# Altium PCB JLINK_OB_072.PcbDoc
Units mm, origin at the board's own origin, x right, y up, seen from the top; angles counter-clockwise.
Board outline 35 x 18 mm, 2 copper layers (Top Layer, Bottom Layer), stack 1.671 mm thick; 27 components, 25 nets, 147 pads, 33 vias.
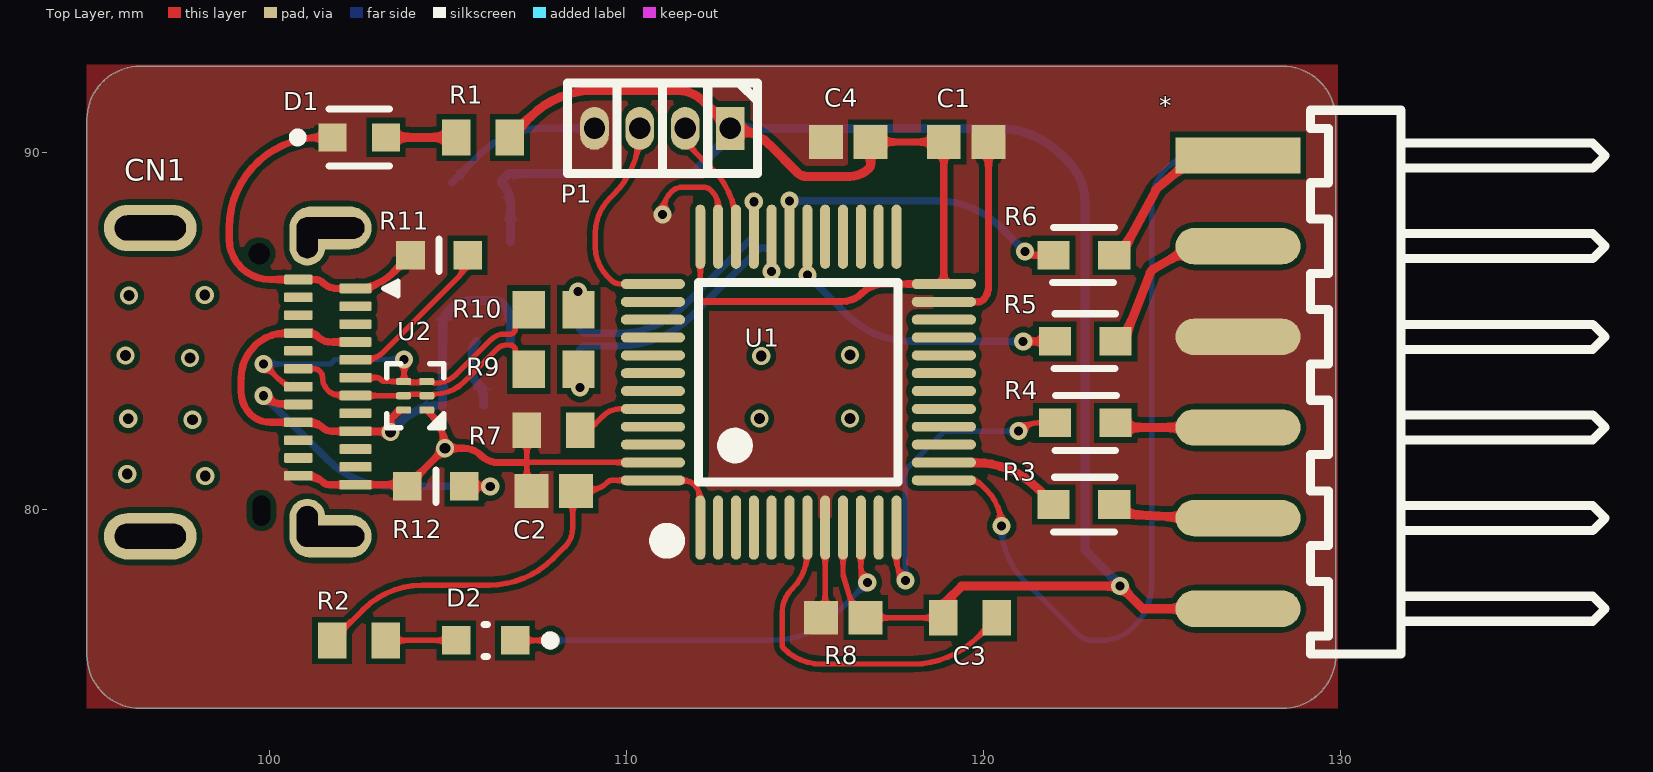
[diagram p0: Top Layer view]
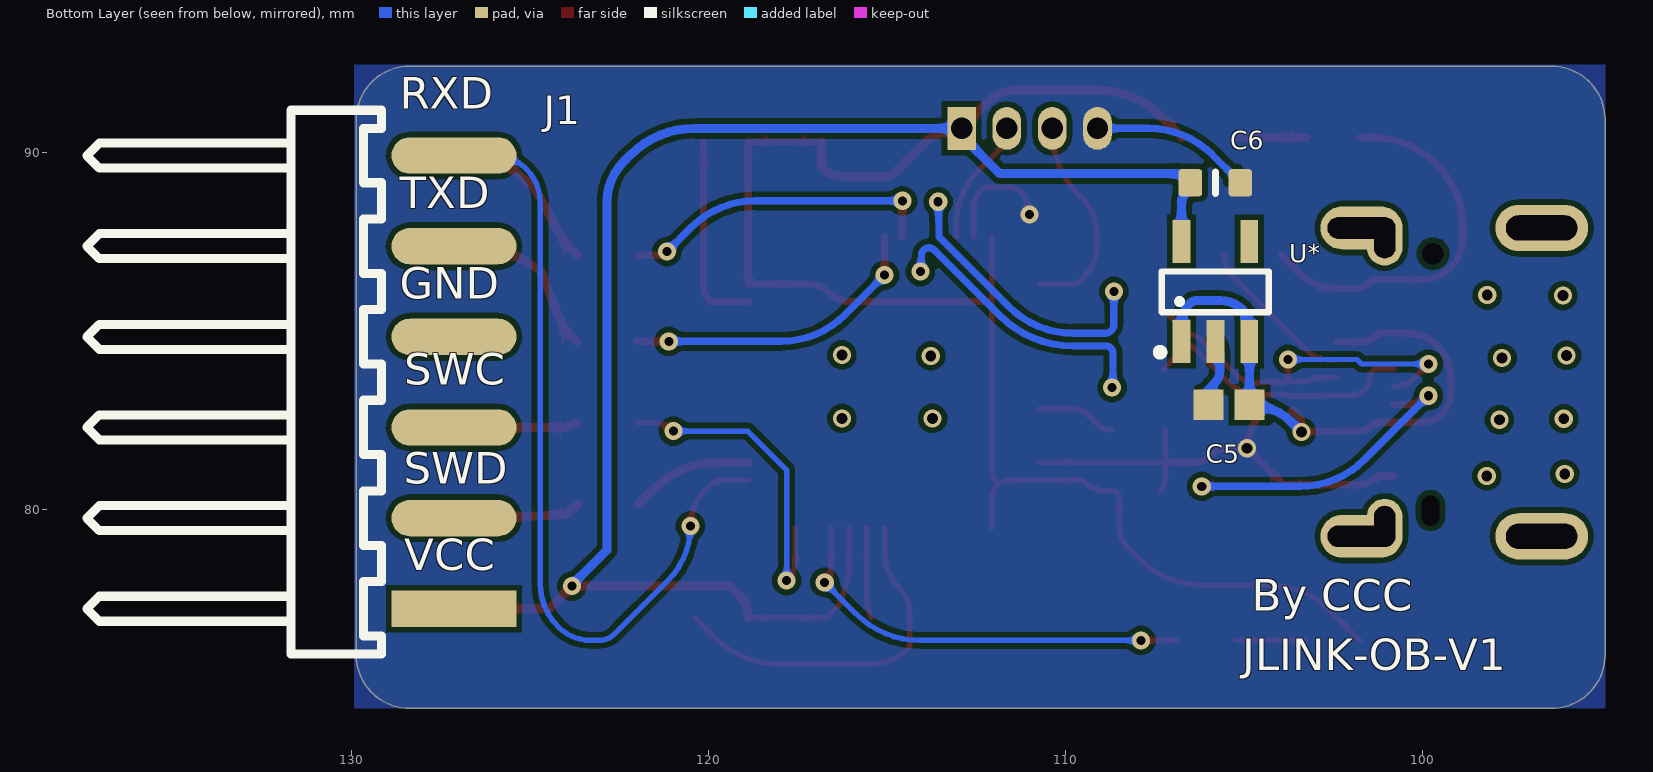
[diagram p1: Bottom Layer view, seen from below]

## Layer stack, top to bottom
Top Solder: solder mask 0.0102, Solder Resist, Dk 3.5
Top Layer: signal copper 0.0356
Dielectric 1: dielectric 1.6, FR-4, Dk 4.8
Bottom Layer: signal copper 0.0356
Bottom Solder: solder mask 0.0102, Solder Resist, Dk 3.5

## Board outline
94.869,75.922 94.869,90.922 cw(c96.369,90.922) 96.369,92.422 128.369,92.422 cw(c128.369,90.922) 129.869,90.922 129.869,75.922 cw(c128.369,75.922) 128.369,74.422 96.369,74.422 cw(c96.369,75.922)

## Design rules (kind name [scope] priority, off if disabled: settings)
Clearance [All] p1: gap=0.152 ignorepadtopadclearanceinfootprint=FALSE
DiffPairsRouting DiffPair_DiffPairsRouting [All] p1: maxlimit=0.203 minlimit=0.152 mostfreqgap=0.152 toplayer_minwidth=0.152 toplayer_maxwidth=0.203 toplayer_prefwidth=0.152 bottomlayer_minwidth=0.152 bottomlayer_maxwidth=0.203 bottomlayer_prefwidth=0.152 maxuncoupledlength=12.7
DiffPairsRouting [All] p2: maxlimit=0.254 minlimit=0.254 mostfreqgap=0.254 toplayer_minwidth=0.381 toplayer_maxwidth=0.381 toplayer_prefwidth=0.381 bottomlayer_minwidth=0.381 bottomlayer_maxwidth=0.381 bottomlayer_prefwidth=0.381 maxuncoupledlength=12.7
MatchedLengths DiffPair_MatchedLengths [All] p1: tolerance=25.4 checknetsindiffpair=FALSE checkdiffpairvsdiffpair=TRUE checkxsignals=TRUE checkothers=TRUE
PolygonConnect [All] p1: connectstyle=Direct reliefconductorwidth=0.254 reliefentries=4 polygonreliefangle="90 Angle" airgapwidth=0.254
RoutingVias [All] p1: holewidth=0.254 width=0.508 viastyle="Through Hole" minholewidth=0.254 minwidth=0.508 maxholewidth=0.305 maxwidth=0.61
SolderMaskExpansion [All] p1: expansion=0.102 istentingtop=FALSE
Width [All] p1: maxlimit=0.254 minlimit=0.152 preferedwidth=0.152
29 further rules are at their usual default settings.

## Components (designator, comment, footprint, x,y, rotation, side; value= is the part's Value field where it differs from the comment)
* "2.54排针6p" HDR2.54-WS-6P 127.127,83.566 r270 top
C1 "Capacitor 100 nF +/-10% 50 V 0603" CAPC1608X90X40NL10T20 119.507,90.297 r0 top value=100nF
C2 "Capacitor 100 nF +/-10% 50 V 0603" CAPC1608X90X40NL10T20 107.95,80.518 r180 top value=100nF
C3 "Capacitor 100 nF +/-10% 50 V 0603" CAPC1608X90X40NL10T20 116.066,76.962 r180 top value=100nF
C4 "Capacitor 100 nF +/-10% 50 V 0603" CAPC1608X90X40NL10T20 116.205,90.297 r180 top value=100nF
C5 "Capacitor 1 uF +/- 10% 25 V 0603" CAPC1608X90X40LL10T20 105.41,82.931 r180 bottom value=1µF
C6 "Capacitor 4.7µF +/-20% 10V 0603" CAPC0603(1608)100_L 105.791,89.154 r0 bottom value=4.7µF
CN1 "DX07S024JJ3R1300" JAE-DX07S024JJ3_V 99.695,83.566 r270 top
D1 "597-3901-831F" FP-597-3901-831F-MFG 102.502,90.424 r0 top
D2 "APT1608ZGCK" FP-APT1608ZGCK-MFG 106.045,76.327 r180 top
J1 "2.54排针6p" HDR2.54-WS-6P 127.127,83.566 r90 bottom (schematic designator *1)
P1 "1.27排针4p" HDR1.27-LI-4P 110.998,90.678 r180 top
R1 "Resistor 1k +/-1% 0603 100 mW" RESC1608X55X25ML10T15 105.972,90.424 r180 top value=1k
R2 "Resistor 1k +/-1% 0603 100 mW" RESC1608X55X25ML10T15 102.493,76.327 r0 top value=1k
R3 "RC0603JR-07100RL" FP-RC0603-0_55-MFG 122.809,80.137 r180 top value=100
R4 "RC0603JR-07100RL" FP-RC0603-0_55-MFG 122.848,82.423 r180 top value=100
R5 "RC0603JR-07100RL" FP-RC0603-0_55-MFG 122.848,84.709 r0 top value=100
R6 "RC0603JR-07100RL" FP-RC0603-0_55-MFG 122.809,87.122 r0 top value=100
R7 "Resistor 10k +/-1% 0603 100 mW" RESC1608X55X25ML10T15 107.95,82.22 r180 top value=10k
R8 "Resistor 10k +/-1% 0603 100 mW" RESC1608X55X25ML10T15 119.622,76.962 r180 top value=10k
R9 "Resistor 22R +/-1% 0603 100 mW" RESC1609X50X30ML08T20 107.95,83.921 r180 top value=22
R10 "Resistor 22R +/-1% 0603 100 mW" RESC1609X50X30ML08T20 107.95,85.598 r180 top value=22
R11 "RC1608J512CS" FP-RC1608-MFG 104.737,87.122 r0 top value=5.1k
R12 "RC1608J512CS" FP-RC1608-MFG 104.648,80.645 r180 top value=5.1k
U1 "STM32F072CBT6TR" "LQFP48 7X7_N" 114.808,83.566 r0 top
U2 "ESDR0502NMUTBG" ONSC-UDFN-6-517AA-01_V 104.069,83.185 r180 top
U* "ME6211C33M5G-N" SOT23-5N 105.791,86.106 r180 bottom

## Footprints (in the part's own frame and the unit in brackets; to place one, negate y for a bottom-side part, rotate by r counter-clockwise, add the part's x,y. Pads: shape width x height; smd on the part's side, far side on the other; paste and mask are expansions set on the pad)
CAPC0603(1608)100_L [mm] "Chip Capacitor, Body 1.6x0.8mm, Height 1.0mm, IPC High Density"
  rrect25% 0.66x0.76 smd: 1(-0.7,0) 2(0.7,0)
  silkscreen extent 0,-0.3 0,0.3, body extent -0.8,-0.4 0.8,0.4, height 0.95
CAPC1608X90X40LL10T20 [mm] "Chip Capacitor, 2-Leads, Body 1.70x0.90mm, IPC High Density"
  rect 0.85x0.85 smd: 1(-0.575,0) 2(0.575,0)
  body extent -0.85,-0.45 0.85,0.45, height 0.9
CAPC1608X90X40NL10T20 [mm] "Chip Capacitor, 2-Leads, Body 1.70x0.90mm, IPC Medium Density"
  rect 0.95x0.95 smd: 1(-0.625,0) 2(0.625,0)
  body extent -0.85,-0.45 0.85,0.45, height 0.9
FP-597-3901-831F-MFG [mil]
  rect 31x31 smd paste+0 mask+0: 1(-29.5,0) 2(29.5,0)
  silkscreen extent -73,-31 34,31, body extent -49,-22 49,22, height 10
FP-APT1608ZGCK-MFG [mm]
  rect 0.8x0.8 smd paste+0 mask+0: 1(-0.825,0) 2(0.825,0)
  silkscreen extent -1.92,-0.45 0.05,0.45, body extent -1.33,-0.55 1.33,0.55, height 0.25
FP-RC0603-0_55-MFG [mm]
  rect 0.9x0.8 smd paste+0 mask+0: 1(-0.85,0) 2(0.85,0)
  silkscreen extent -0.87,-0.76 0.85,0.77, body extent -1.4,-0.55 1.4,0.55, height 0.25
FP-RC1608-MFG [mm]
  rect 0.8x0.8 smd paste+0 mask+0: 1(-0.8,0) 2(0.8,0)
  silkscreen extent 0,-0.45 0,0.45, body extent -1.3,-0.55 1.3,0.55, height 0.25
HDR1.27-LI-4P [mm] "直插，脚距：1.27mm"
  rect 0.8x1.2 hole 0.6: 1(-1.905,0)
  oval 0.8x1.2 hole 0.6: 2(-0.635,0) 3(0.635,0) 4(1.905,0)
  silkscreen extent -2.67,-1.27 2.67,1.27, body extent -2.54,-1.24 2.54,1.16, height 4.48
HDR2.54-WS-6P [mm] "6P卧式贴片排针2.54"
  rect 1.02x3.5 smd: 1(-6.35,0)
  oval 1.02x3.5 smd: 2(-3.81,0) 3(-1.27,0) 4(1.27,0) 5(3.81,0) 6(6.35,0)
  silkscreen extent -7.62,2.03 7.62,10.29, body extent -7.62,-0.76 7.62,10.34, height 2.54
JAE-DX07S024JJ3_V [mm] "THD, 24-Leads, Body 8.17x8.94mm, Pitch 0.5mm"
  oval 1.2x2.3 hole 0.6 slot 1.9 at 90 deg: 1(-4.32,2) 2(4.32,2)
  oval 1.5x1 hole 0.6 slot 1.1 at 0 deg: 1(-4.02,1.35) 2(4.02,1.35)
  oval 1.3x2.6 hole 0.7 slot 2 at 90 deg: 3(-4.32,-3.05) 4(4.32,-3.05)
  rrect25% 0.27x0.9 smd: A1(-2.625,2.7) A2(-2.125,2.7) A3(-1.625,2.7) A4(-1.125,2.7) A5(-0.625,2.7) A6(-0.125,2.7) A7(0.375,2.7) A8(0.875,2.7) A9(1.375,2.7) A10(1.875,2.7) A11(2.375,2.7) A12(2.875,2.7)
  rrect25% 0.27x0.8 smd: B1(2.625,1.1) B2(2.125,1.1) B3(1.625,1.1) B4(1.125,1.1) B5(0.625,1.1) B6(0.125,1.1) B7(-0.375,1.1) B8(-0.875,1.1) B9(-1.375,1.1) B10(-1.875,1.1) B11(-2.375,1.1) B12(-2.875,1.1)
  round 0 hole 0.6 unplated: H1(-3.6,0)
  round 0 hole 0.5 slot 0.85 at 0 deg unplated: H2(3.6,0.065)
  silkscreen extent -2.83,3.49 -2.43,3.89, body extent -4.47,-5.35 4.47,2.8, height 3.16
"LQFP48 7X7_N" [mm] "48脚，体宽7x7mm，脚距0.5mm"
  oval 0.279x1.8 smd: 1(-2.75,-4.075) 2(-2.25,-4.075) 3(-1.75,-4.075) 4(-1.25,-4.075) 5(-0.75,-4.075) 6(-0.25,-4.075) 7(0.25,-4.075) 8(0.75,-4.075) 9(1.25,-4.075) 10(1.75,-4.075) 11(2.25,-4.075) 12(2.75,-4.075) 25(2.75,4.075) 26(2.25,4.075) 27(1.75,4.075) 28(1.25,4.075) 29(0.75,4.075) 30(0.25,4.075) 31(-0.25,4.075) 32(-0.75,4.075) 33(-1.25,4.075) 34(-1.75,4.075) 35(-2.25,4.075) 36(-2.75,4.075)
  oval 1.8x0.279 smd: 13(4.075,-2.75) 14(4.075,-2.25) 15(4.075,-1.75) 16(4.075,-1.25) 17(4.075,-0.75) 18(4.075,-0.25) 19(4.075,0.25) 20(4.075,0.75) 21(4.075,1.25) 22(4.075,1.75) 23(4.075,2.25) 24(4.075,2.75) 37(-4.075,2.75) 38(-4.075,2.25) 39(-4.075,1.75) 40(-4.075,1.25) 41(-4.075,0.75) 42(-4.075,0.25) 43(-4.075,-0.25) 44(-4.075,-0.75) 45(-4.075,-1.25) 46(-4.075,-1.75) 47(-4.075,-2.25) 48(-4.075,-2.75)
  silkscreen extent -3.93,-4.69 2.79,2.79, body extent -4.5,-4.5 4.5,4.5, height 1.45
ONSC-UDFN-6-517AA-01_V [mm] "SON, 6-Leads, Body 1.2x1mm, Pitch 0.4mm"
  rrect50% 0.42x0.2 smd: 1(-0.325,0.4) 2(-0.325,0) 3(-0.325,-0.4) 4(0.325,-0.4) 5(0.325,0) 6(0.325,0.4)
  silkscreen extent -0.8,-0.9 0.8,0.9, body extent -0.5,-0.6 0.5,0.6, height 0.55
RESC1608X55X25ML10T15 [mm] "Chip Resistor, 2-Leads, Body 1.70x0.90mm, IPC Low Density"
  rect 0.8x1 smd: 1(-0.75,0) 2(0.75,0)
  body extent -0.85,-0.45 0.85,0.45, height 0.55
RESC1609X50X30ML08T20 [mm] "Chip Resistor, 2-Leads, Body 1.65x0.95mm, IPC Low Density"
  rect 0.9x1.05 smd: 1(-0.7,0) 2(0.7,0)
  body extent -0.82,-0.48 0.82,0.48, height 0.5
SOT23-5N [mm] "3x1.6x1.1mm(长宽高)"
  rect 0.5x1.2 smd: 1(-0.95,-1.4) 2(0,-1.4) 3(0.95,-1.4) 4(0.95,1.4) 5(-0.95,1.4)
  silkscreen extent -1.63,-1.78 1.5,0.56, body extent -1.5,-1.4 1.5,1.4, height 1.15

## Part data
* J1: library part CMP-00001-3
C1 C2 C3 C4: library part CMP-001-00017-6, "Chip Capacitor, 100 nF, +/- 10%, 50 V, 0603 (1608 Metric)", Capacitor Type=Ceramic, Case/Package=0603, Max Operating Temperature=125°C, Min Operating Temperature=-55°C, Tolerance=10%, Voltage Rating=50V, Mounting Technology=SM, Pins=2, RoHS Compliant=True
C5: library part CMP-001-00005-6, "Chip Capacitor, 1 uF, +/- 10%, 25 V, 0603 (1608 Metric)", Capacitor Type=Ceramic, Case/Package=0603, Max Operating Temperature=125°C, Min Operating Temperature=-55°C, Tolerance=10%, Voltage Rating=25V, Mounting Technology=SM, Pins=2, RoHS Compliant=True
C6: library part CMP-001-00076-4, "Chip Capacitor, 4.7µF +/-20%, 10V, 0603, Thickness 1 mm", Case/Package=0603, Max Operating Temperature=85°C, Min Operating Temperature=-55°C, Tolerance=10%, Voltage Rating=10V, Mounting Technology=SMT, Pins=2
CN1: library part CMP-002-00065-4, "USB-C Connector, 20 V, 1.25 A, -30 to 80 degC, RoHS, Tape and Reel", Connector Type=USB-C, Gender=Receptacle, Pins=28
D1: library part CMP-00000-1, "Smd 0603 White 20Pc Smpl Strip / Dialight Corporation Rohs Compliant: Yes", Case Code (Imperial)=0603, Case Code (Metric)=1608, Color=White, Forward Current=20mA, Forward Voltage=3.4V, Lens Color=Yellow, Max Operating Temperature=80°C, Min Operating Temperature=-20°C, Package Quantity=20, Power Rating=70mW, Test Current=10mA, Case/Package=0603, Height=0.55mm, Illumination Color=White, Length=1.6mm, Lens Style=Diffused,Tinted,Rectangular, Luminous Intensity=240mcd, Mounting Technology="Surface Mount", Packaging="Cut Tape", Reach SVHC Compliant=Yes, RoHS Compliant=Yes, Series=597, Viewing Angle=130°, Width=0.8mm
D2: library part CMP-007-00036-1, "LED Uni-Color Green 515nm 2-Pin Chip LED T/R", Case/Package=0603, Forward Current=20mA, Forward Voltage=3.3V, Max Operating Temperature=85°C, Min Operating Temperature=-40°C, Mounting Technology="Surface Mount", RoHS Compliant=Yes
P1: library part CMP-002-00077-1
R1 R2: library part CMP-009-00014-5, "Chip Resistor, 1 KOhm, +/-1%, 0.1 W, -55 to 155 degC, 0603 (1608 Metric)", Case/Package=0603, Max Operating Temperature=155°C, Min Operating Temperature=-55°C, Power=100mW, Tolerance=1%, Voltage Rating=50V, Mounting Technology=SM, Pins=2, RoHS Compliant=True
R3 R4 R5 R6: library part CMP-009-00182-1, "Res Thick Film 0603 100 Ohm 5% 1/10W ±100ppm/°C Molded SMD SMD Paper T/R", Case/Package=0603, Max Operating Temperature=155°C, Min Operating Temperature=-55°C, Tolerance=5%, Voltage Rating=50V, Pins=2, RoHS Compliant=Yes
R7 R8: library part CMP-009-00017-5, "Chip Resistor, 10 KOhm, +/- 1%, 01 W, -55 to 155 degC, 0603 (1608 Metric)", Case/Package=0603, Max Operating Temperature=155°C, Min Operating Temperature=-55°C, Power=100mW, Tolerance=1%, Voltage Rating=50V, Mounting Technology=SM, Pins=2, RoHS Compliant=True
R9 R10: library part CMP-009-00027-5, "Chip Resistor, 22 Ohm, +/- 1%, 100 mW, -55 to 155 degC, 0603 (1608 Metric)", Case/Package=0603, Max Operating Temperature=155°C, Min Operating Temperature=-55°C, Power=100mW, Tolerance=1%, Voltage Rating=75V, Mounting Technology=SM, Pins=2, RoHS Compliant=True
R11 R12: library part CMP-009-00183-1, "Res Thick Film 0603 5.1K Ohm 5% 1/10W ±100ppm/°C Molded SMD SMD T/R", Case/Package=0603, Max Operating Temperature=155°C, Min Operating Temperature=-55°C, Tolerance=5%, RoHS Compliant=Yes
U1: library part CMP-020-00024-2, "MCU 32-Bit GP STM32F 32MHz ARM Cortex M0+ RISC 128kB Flash 48-Pin LQFP T/R", Case/Package=LQFP, Clock Frequency=48MHz, Max Operating Temperature=85°C, Max Supply Voltage=3.6V, Min Operating Temperature=-40°C, Min Supply Voltage=2V, Frequency=48MHz, Interface=I2C,SPI,USB,CAN,HDMI,IrDA,UART,USART,LIN,I2S, Mounting Technology="Surface Mount", Pins=48, RAM Size=16KB, RoHS Compliant=Yes
U2: library part CMP-004-00025-1, "Ultra Low Capacitance ESD Protection Array for High Speed Data Line Protection, 6-Pin UDFN, Pb-Free, Tape and Reel", ComponentLink1Description="Manufacturer URL", ComponentLink1URL=http://www.onsemi.com/, ComponentLink2Description=Datasheet, ComponentLink2URL=http://www.onsemi.cn/pub_link/Collateral/ESDR0502N-D.PDF, ComponentLink3Description="Package Specification", ComponentLink3URL=http://www.onsemi.com/pub_link/Collateral/517AA.PDF, Mounting Technology=SMT, Pins=6
U*: library part CMP-019-00052-1, "VIN=6.5V Vo=3.3V Io=600mA"

## Via types
v1: diameter 0.508, hole 0.254, Top Layer to Bottom Layer, 19 vias
v2: diameter 0.508, hole 0.305, Top Layer to Bottom Layer, 14 vias

## Nets (pads, with @x,y where several pads share a name; then routed paths per layer and width w, separated by ;. In a path a pad name is that pad's centre, name@x,y a point inside that pad or via, vN(x,y) a via of type N, cw(c..) or ccw(c..) an arc to the next point about the centre after c; other vN are vias at no path point)
+5: C5.2 CN1.A4 CN1.A9 CN1.B4 CN1.B9 U2.6 U*.1 U*.3 | length 17
  Top Layer w0.203: CN1.A4 101.696,84.691 cw(c101.696,85.186) 101.346,84.836 ccw(c101.093,84.583) 101.093,84.941 CN1.B9 100.435,84.941 ccw(c100.435,83.715) 99.568,84.582 ccw(c100.478,83.672) 99.191,83.672 99.187,83.312 ccw(c100.107,83.312) 99.448,82.67 ccw(c100.011,83.247) 100.011,82.441 CN1.B4 101.123,82.441 cw(c101.123,81.946) 101.473,82.296 ccw(c101.726,82.549) 101.726,82.191 CN1.A9 102.406,82.18 103.367,82.18 v2(103.378,82.169) 103.383,82.174 103.383,82.531 U2.6@103.636,82.783
  Bottom Layer w0.254: v2(103.378,82.169) 103.649,82.44 cw(c104.835,81.253) C5.2 104.835,84.7 U*.3 104.841,85.144 cw(c105.483,85.144) 105.029,85.598 cw(c105.642,84.985) 105.642,85.852 106.299,85.852 cw(c106.299,85.545) 106.516,85.762 106.553,85.725 cw(c106.099,85.271) 106.741,85.271 U*.1
boot: R7.1 U1.44 | length 2.2
  Top Layer w0.152: R7.1 ccw(c108.7,82.8) 109.11,82.39 109.347,82.626 cw(c109.805,82.168) 109.805,82.816 U1.44
GND: *.3 C1.2 C2.2 C3.2 C4.2 C5.1 C6.1 CN1.A1 CN1.A12 CN1.B1 CN1.B12 D1.1 P1.4 R7.2 R11.1 R12.2 U1.8 U1.23 U1.35 U1.47 U2.1 U*.2 | length 42
  Top Layer w0.152: 107.2,81.316 R7.2 ; C2.2 cw(c107.627,80.82) 107.2,80.82 107.2,81.28 cw(c107.287,81.193) 107.287,81.316 U1.47 ; v1(110.998,88.265) 110.998,88.287 cw(c111.865,88.287) 111.252,88.9 cw(c111.559,88.593) 111.559,89.027 112.141,89.027 cw(c112.141,88.72) 112.358,88.937 112.395,88.9 cw(c112.001,88.506) 112.558,88.506 U1.35 ; C3.2 115.558,77.361 U1.8
  Top Layer w0.203: CN1.B1 101.065,80.941 cw(c101.065,80.364) 101.473,80.772 ccw(c101.669,80.968) 101.669,80.691 CN1.A12 103.737,80.691 cw(c103.737,80.534) R12.2 103.848,80.658 v2(104.902,81.712) ; D1.1 101.397,90.424 ccw(c101.397,87.884) 98.857,87.884 98.857,87.579 ccw(c99.995,87.579) 99.995,86.441 CN1.B12 101.277,86.441 cw(c101.277,86.164) 101.473,86.36 ccw(c101.881,86.768) 101.881,86.191 CN1.A1 ccw(c102.395,87.666) 103.438,86.623 R11.1 ; U2.1 104.502,82.677 cw(c103.537,81.712) v2(104.902,81.712) ; 107.2,81.316 106.383,81.316 cw(c106.383,81.974) 105.918,81.509 ccw(c105.427,81.018) 105.427,81.712 v2(104.902,81.712) ; U1.23 119.841,85.816 ccw(c119.841,86.026) 119.99,85.877 ccw(c119.646,86.221) 120.132,86.221 C1.2
  Bottom Layer w0.203: C6.1 105.871,89.934 cw(c107.667,88.138) 107.667,90.678 P1.4
  Bottom Layer w0.254: U*.2 ccw(c106.098,84.399) 105.664,84.399 105.664,83.873 ccw(c106.098,83.873) 105.791,83.566 cw(c105.323,83.098) 105.985,83.098 C5.1
NetCN1_A5: CN1.A5 R11.2 | length 4.5
  Top Layer w0.152: CN1.A5 102.66,84.191 ccw(c102.66,84.919) 103.175,84.404 105.286,86.515 ccw(c104.679,87.122) R11.2
NetCN1_B5: CN1.B5 R12.1 | length 9.1
  Top Layer w0.203: v1(99.822,83.185) ccw(c100.411,83.774) 100.411,82.941 CN1.B5 ; R12.1 v1(106.172,80.645)
  Bottom Layer w0.203: v1(99.822,83.185) 101.618,81.389 ccw(c103.414,83.185) 103.414,80.645 v1(106.172,80.645)
NetD1_2: D1.2 R1.2 | length 2
  Top Layer w0.254: D1.2 R1.2
NetD2_1: D2.1 U1.10 | length 12
  Top Layer w0.152: D2.1 v1(107.874,76.327) ; U1.10 116.558,78.388 ccw(c117.174,78.388) v1(116.738,77.953)
  Bottom Layer w0.152: v1(107.874,76.327) 114.061,76.327 ccw(c114.061,78.867) 115.857,77.071 v1(116.738,77.953)
NetD2_2: D2.2 R2.2 | length 2
  Top Layer w0.152: R2.2 D2.2
NetR3_2: R3.2 U1.14 | length 3.5
  Top Layer w0.254: U1.14 119.728,81.316 cw(c119.728,78.776) 121.524,80.572 R3.2
NetR4_2: R4.2 U1.12 | length 9.4
  Top Layer w0.152: U1.12 117.558,78.6 ccw(c118.402,78.6) v1(117.805,78.003) ; v1(120.98,82.194) cw(c121.532,81.643) 121.532,82.423 R4.2
  Bottom Layer w0.152: v1(117.805,78.003) 117.805,81.102 118.897,82.194 v1(120.98,82.194)
NetR5_1: R5.1 U1.30 | length 8.7
  Top Layer w0.203: U1.30 115.062,87.637 v1(115.062,86.563) ; v1(121.107,84.709) R5.1
  Bottom Layer w0.203: v1(115.062,86.563) 116.172,85.453 ccw(c117.968,87.249) 117.968,84.709 v1(121.107,84.709)
NetR6_1: R6.1 U1.31 | length 8.9
  Top Layer w0.203: U1.31 v1@114.558,88.647 ; v1(121.158,87.224) ccw(c121.403,87.469) 121.403,87.122 R6.1
  Bottom Layer w0.203: v1(114.558,88.648) 118.682,88.648 cw(c118.682,86.108) 120.478,87.904 v1(121.158,87.224)
rst: R8.1 U1.7 | length 10.1
  Top Layer w0.152: U1.7 115.058,78.808 cw(c113.597,78.808) 114.63,77.775 ccw(c115.305,77.1) 114.351,77.1 114.351,76.221 ccw(c114.524,76.221) 114.402,76.098 ccw(c115.444,77.141) 115.444,75.667 118.024,75.667 ccw(c118.024,78.207) 119.821,76.411 R8.1
RXD: *.1 R6.2 | length 4.8
  Top Layer w0.254: R6.2 123.982,87.395 124.822,88.946 cw(c125.046,88.825) 124.884,89.02 125.504,89.533 *.1
SWC: *.4 R4.1 | length 3.5
  Top Layer w0.254: R4.1 124.021,82.296 *.4
swclk: P1.3 U1.37 | length 5.9
  Top Layer w0.152: P1.3 110.363,90.613 cw(c107.823,90.613) 109.619,88.816 109.525,88.722 ccw(c110.506,87.741) 109.118,87.741 109.118,87.351 ccw(c110.284,87.351) 109.46,86.527 109.576,86.411 ccw(c109.804,86.64) 109.804,86.316 U1.37
SWD: *.5 R3.1 | length 3.6
  Top Layer w0.254: R3.1 123.982,79.864 125.887,79.756 *.5
swio: P1.2 U1.34 | length 3.5
  Top Layer w0.152: P1.2 ccw(c112.553,90.678) 111.902,90.028 112.42,89.51 cw(c110.881,87.97) 113.058,87.97 U1.34
SWO: J1.6 U1.13 | length 23.2
  Top Layer w0.152: U1.13 119.644,80.816 cw(c119.644,80.427) 119.919,80.702 120.087,80.534 cw(c119.091,79.538) v1(120.499,79.538)
  Bottom Layer w0.152: v1(120.499,79.538) ccw(c122.676,79.538) 121.137,77.999 122.629,76.507 ccw(c123.063,76.94) 123.063,76.327 123.286,76.327 ccw(c123.286,77.628) 124.206,76.708 ccw(c122.98,77.934) 124.714,77.934 124.714,88.615 cw(c126.015,88.615) 125.095,89.535 cw(c126.015,88.615) 126.015,89.916 J1.6
TXD: *.2 R5.2 | length 4.9
  Top Layer w0.254: R5.2 124.021,84.982 124.667,86.621 cw(c124.903,86.528) 124.778,86.749 125.887,87.376 *.2
USB-DM: R9.1 U1.32 | length 8
  Bottom Layer w0.203: v1(108.687,83.414) cw(c108.748,83.475) 108.661,83.475 108.661,84.379 cw(c108.864,84.379) 108.721,84.522 cw(c108.864,84.379) 108.864,84.582 109.783,84.582 ccw(c109.783,87.472) 111.826,85.429 113.655,87.257 ; 113.655,87.257 cw(c113.839,87.073) 113.756,87.32 cw(c113.82,87.127) 114.023,87.142 v1(114.058,86.661)
USB-DP: R10.1 U1.33 | length 8
  Bottom Layer w0.203: v1(108.636,86.106) 108.636,85.184 ccw(c108.882,85.184) 108.708,85.01 ccw(c108.882,85.184) 108.882,84.938 109.78,84.938 ccw(c109.78,87.478) 111.576,85.682 113.538,87.643 113.538,87.859 v1(113.558,88.621)
USBD+: CN1.A6 CN1.B6 R10.2 U2.3 U2.4 | length 11.6
  Top Layer w0.152: v1(99.822,84.074) 100.215,83.681 ccw(c100.795,84.262) 100.235,83.661 100.244,83.654 cw(c100.14,83.542) 100.245,83.652 ; 100.246,83.652 ccw(c100.429,83.84) 100.269,83.632 cw(c100.174,83.512) 100.271,83.63 ccw(c100.795,84.262) 100.487,83.501 cw(c100.429,83.36) 100.489,83.5 CN1.B6 ; CN1.A6 102.999,83.691 cw(c103.242,83.938) 102.997,83.693 cw(c102.997,83.57) 103.084,83.657 103.099,83.642 ccw(c103.237,83.78) 103.237,83.585 U2.4 ; v1(103.759,84.201) 103.759,83.585 U2.4 ; R10.2 106.989,85.337 ccw(c107.262,85.064) 106.876,85.064 cw(c106.724,85.064) 106.832,84.957 cw(c106.724,85.064) 106.724,84.912 106.568,84.912 ccw(c106.568,84.383) 106.194,84.757 105.227,83.79 cw(c104.616,84.401) 104.616,83.537 cw(c104.616,83.578) 104.587,83.549 ccw(c104.559,83.521) 104.559,83.561 104.451,83.561 cw(c104.451,83.642) U2.3 cw(c104.337,83.642) 104.337,83.561 103.878,83.561 U2.4
  Bottom Layer w0.152: v1(99.822,84.074) 101.693,84.074 101.82,84.201 v1(103.759,84.201)
USBD-: CN1.A7 CN1.B7 R9.2 U2.2 U2.5 | length 7.8
  Top Layer w0.152: CN1.B7 101.225,83.941 cw(c101.225,83.693) 101.473,83.693 ccw(c101.975,83.693) 101.975,83.191 CN1.A7 102.743,83.191 102.749,83.185 U2.5 cw(c103.801,83.128) 103.801,83.209 103.909,83.209 ccw(c103.909,83.249) 103.937,83.221 cw(c103.966,83.192) 103.966,83.233 104.172,83.233 cw(c104.172,83.192) 104.201,83.221 ccw(c104.229,83.249) 104.229,83.209 104.337,83.209 cw(c104.337,83.128) U2.2 cw(c104.451,83.128) 104.451,83.209 104.559,83.209 ccw(c104.559,83.249) 104.587,83.221 cw(c104.616,83.192) 104.616,83.233 ; 104.617,83.233 ccw(c104.617,84.399) 105.442,83.574 106.364,84.497 cw(c106.631,84.231) 106.631,84.607 106.724,84.607 cw(c106.724,84.455) 106.832,84.563 cw(c106.724,84.455) 106.876,84.455 ccw(c107.262,84.455) 106.989,84.182 R9.2
VCC: *.6 C1.1 C2.1 C3.1 C4.1 C6.2 P1.1 R1.1 R2.1 R8.2 U1.1 U1.9 U1.24 U1.36 U1.48 U*.5 | length 90.9
  Top Layer w0.152: R2.1 102.603,77.187 cw(c104.267,75.524) 104.267,77.876 106.136,77.876 ccw(c106.136,80.416) 107.932,78.62 108.268,78.956 ccw(c107.748,79.477) 108.483,79.477 108.483,80.297 cw(c108.796,80.297) C2.1 108.861,80.518 ccw(c108.861,81.385) 109.474,80.772 cw(c109.58,80.666) 109.58,80.816 U1.48 111.597,80.816 cw(c111.597,80.406) 111.887,80.696 ; U1.1 112.058,80.283 ccw(c111.474,80.283) 111.887,80.696 ; U1.36 112.058,81.109 cw(c111.474,81.109) 111.887,80.696 ; U1.9 116.058,78.196 ccw(c116.21,78.196) 116.065,78.152 116.299,77.38 ccw(c116.445,77.424) 116.337,77.316 C3.1 R8.2
  Top Layer w0.203: 112.09,85.827 116.034,85.827 ccw(c116.034,86.607) 116.586,86.055 cw(c117.216,85.426) 117.216,86.316 U1.24 U1.24 C1.1 C4.1
  Top Layer w0.254: R1.1 107.298,91.001 cw(c109.095,89.205) 109.095,91.745 111.404,91.745 cw(c111.404,90.702) 112.142,91.439 ; 112.167,91.414 P1.1 ; P1.1@112.928,90.653 P1.1 ; C4.1 116.83,89.659 cw(c116.691,89.659) 116.789,89.56 cw(c116.237,90.112) 116.237,89.332 115.028,89.332 cw(c115.028,89.679) 114.783,89.433 113.987,90.229 ccw(c112.903,89.145) P1.1 ; R8.2 cw(c119.792,76.962) 119.141,77.612 119.38,77.851 v1(123.825,77.851) 124.46,77.216 *.6
  Bottom Layer w0.254: U*.5 106.741,88.55 ccw(c105.887,88.55) C6.2 106.491,89.204 106.694,89.407 106.744,89.407 106.745,89.408 111.833,89.408 112.903,90.478 P1.1 120.385,90.678 cw(c120.385,88.138) 122.181,89.934 122.377,89.738 cw(c121.273,88.634) 122.834,88.634 122.834,79.919 122.834,78.867 123.825,77.876 v1(123.825,77.851)
pads on no net: CN1.1 CN1.2 CN1.3 CN1.4 CN1.A2 CN1.A3 CN1.A8 CN1.A10 CN1.A11 CN1.B2 CN1.B3 CN1.B8 CN1.B10 CN1.B11 CN1.H1 CN1.H2 J1.1 J1.2 J1.3 J1.4 J1.5 U1.2 U1.3 U1.4 U1.5 U1.6 U1.11 U1.15 U1.16 U1.17 U1.18 U1.19 U1.20 U1.21 U1.22 U1.25 U1.26 U1.27 U1.28 U1.29 U1.38 U1.39 U1.40 U1.41 U1.42 U1.43 U1.45 U1.46 U*.4
copper on no net:
  other v2: 98.186,80.938 96.001,80.989 97.83,82.513 96.027,82.538 113.716,82.55 116.256,82.55 97.754,84.24 113.767,84.303 95.95,84.316 116.256,84.328 96.052,85.993 98.171,86.004

## Polygon pours and split planes (outlines as drawn)
GND on Bottom Layer "GND_L02_P000" (solid, pour order 0): 94.869,92.456 129.921,92.456 129.921,74.422 94.869,74.422
GND on Top Layer "GND_L01_P001" (solid, remove dead copper, pour order 1): 94.869,92.456 129.921,92.456 129.921,74.422 94.869,74.422

## Silkscreen, mask and mechanical layers (free items; w line width, h text height)
Bottom Overlay:
  text "RXD" at 128.651,90.932 h1.52
  text "TXD" at 128.651,88.138 h1.52
  text "GND" at 128.651,85.615 h1.52
  text "SWC" at 128.524,83.202 h1.52
  text "SWD" at 128.54,80.418 h1.52
  text "VCC" at 128.523,77.995 h1.52
  text "By CCC" at 104.775,76.867 h1.52
  text "JLINK-OB-V1" at 105.032,75.201 h1.52
Mechanical 5:
  the board outline again, w0.1

## Text inside footprints (layer, text, board x,y; h text height)
CN1: Top 3D Body "Board Edge" at 94.395,84.666 h0.5 r270